# Altium PCB B302.PcbDoc
Units mm, origin at the board's own origin, x right, y up, seen from the top; angles counter-clockwise.
Board outline 30 x 59.25 mm, 4 copper layers (Top Layer, Int1, Int2, Bottom Layer), stack 0.922 mm thick; 98 components, 75 nets, 288 pads, 74 vias.
Unrouted connection lines stored in the file: 78.
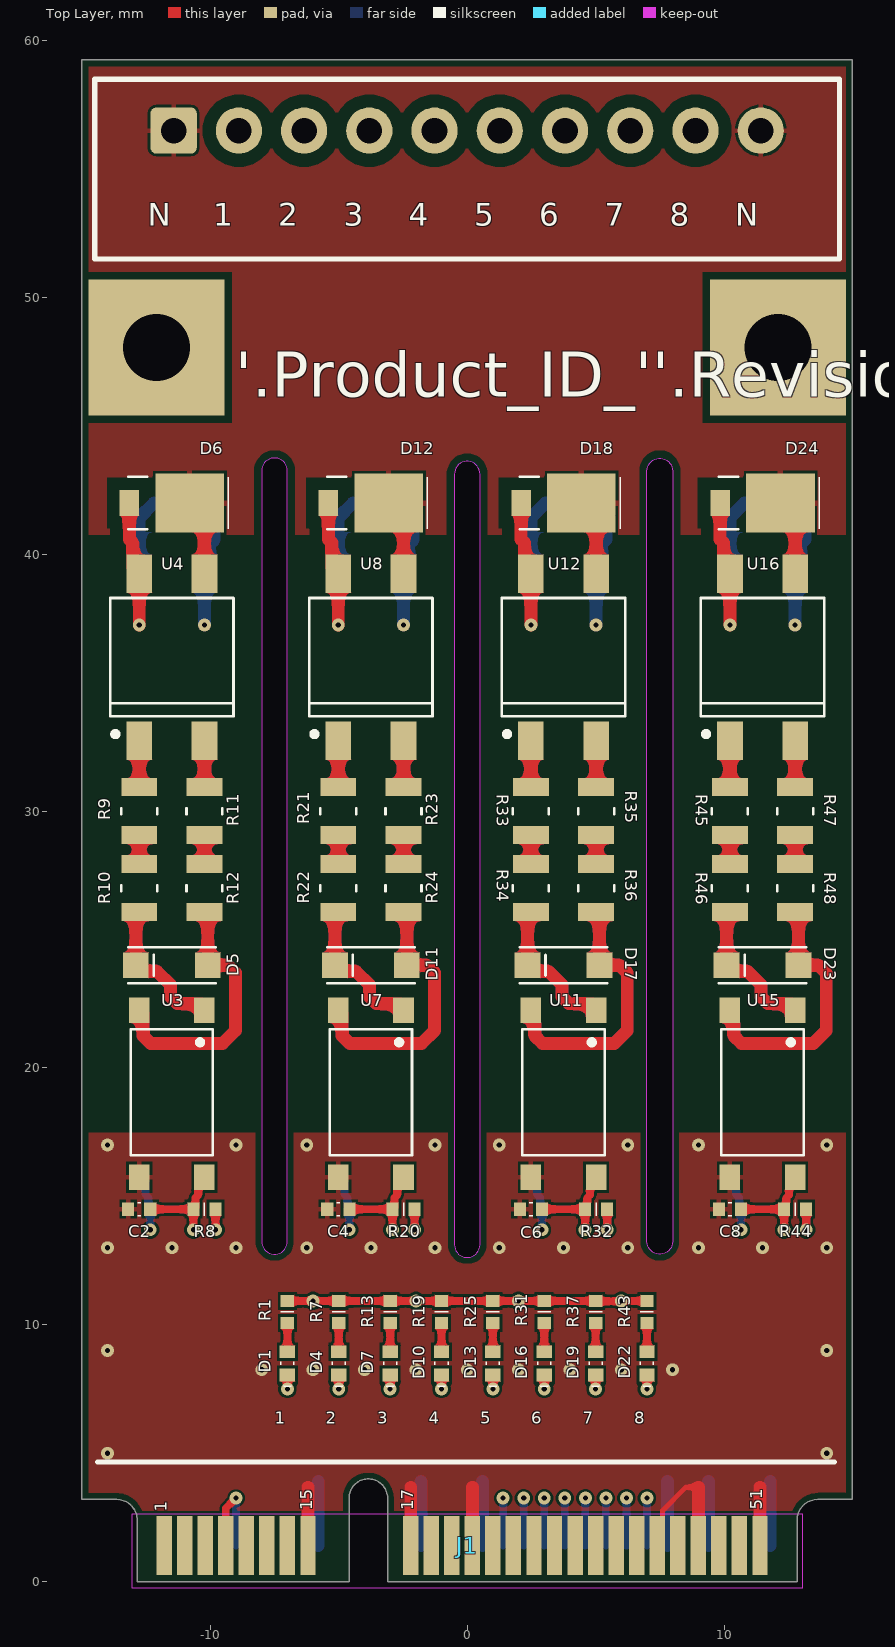
[diagram p0: Top Layer view]
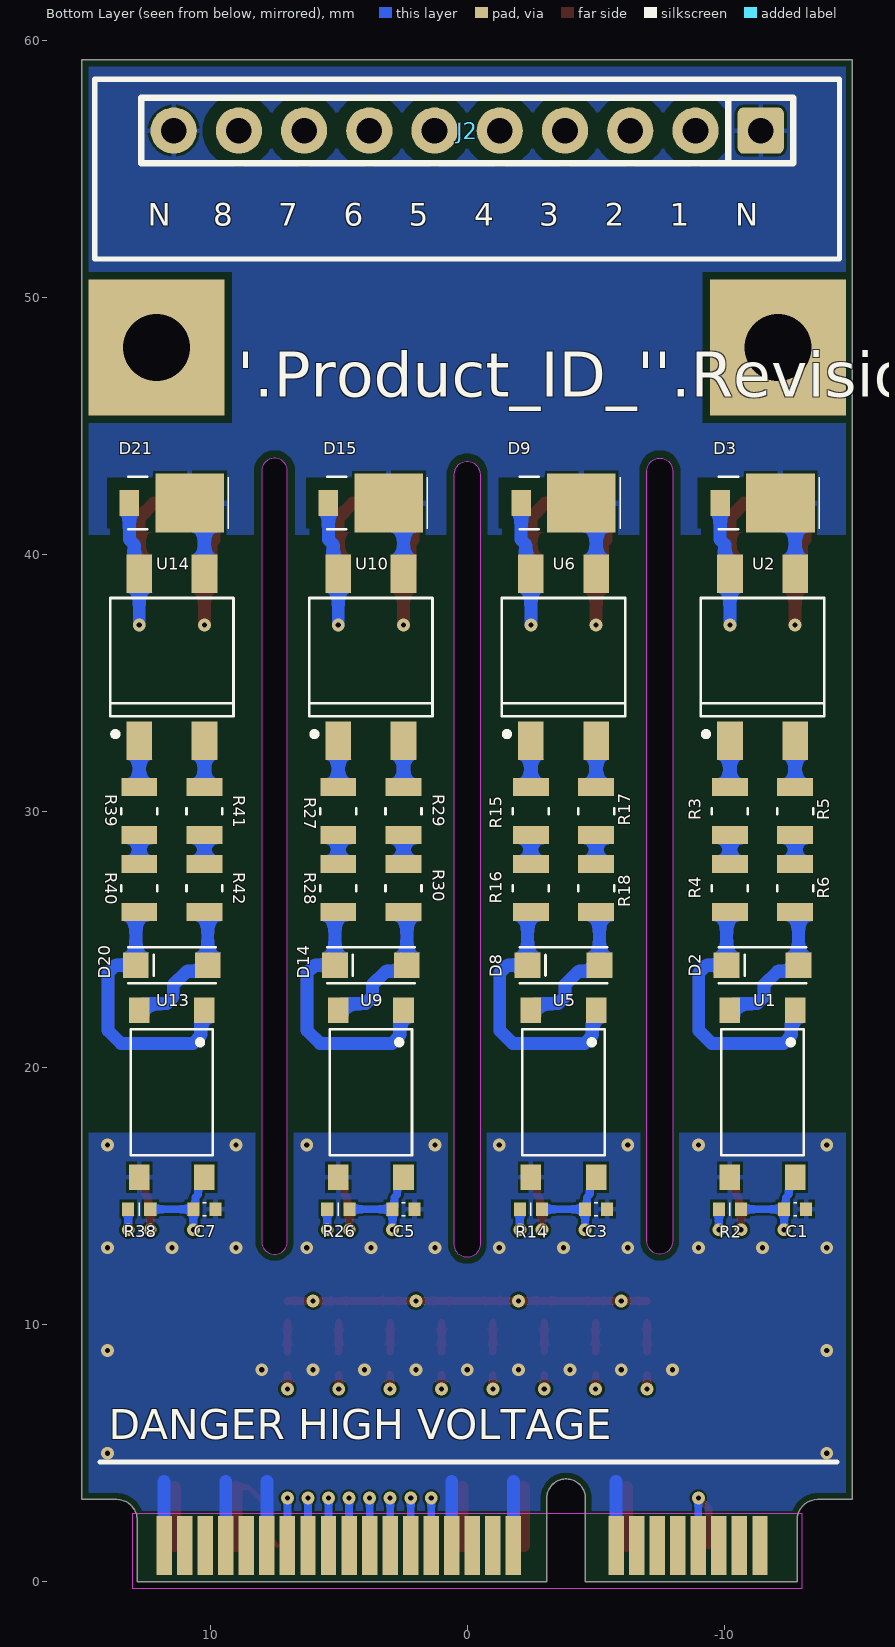
[diagram p1: Bottom Layer view, seen from below]
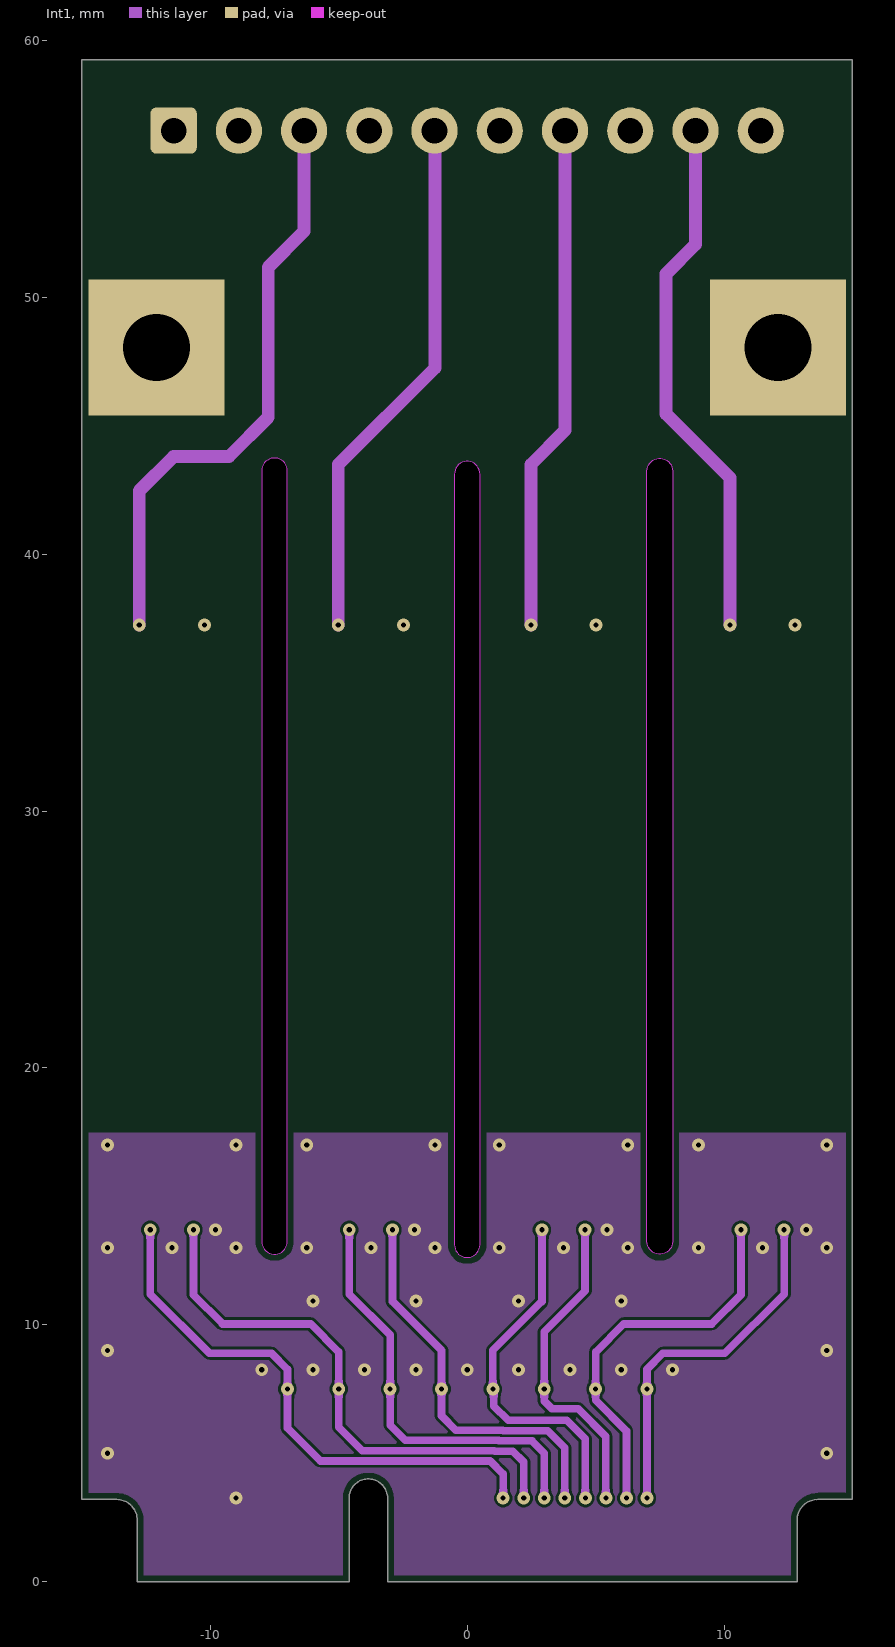
[diagram p2: Int1]
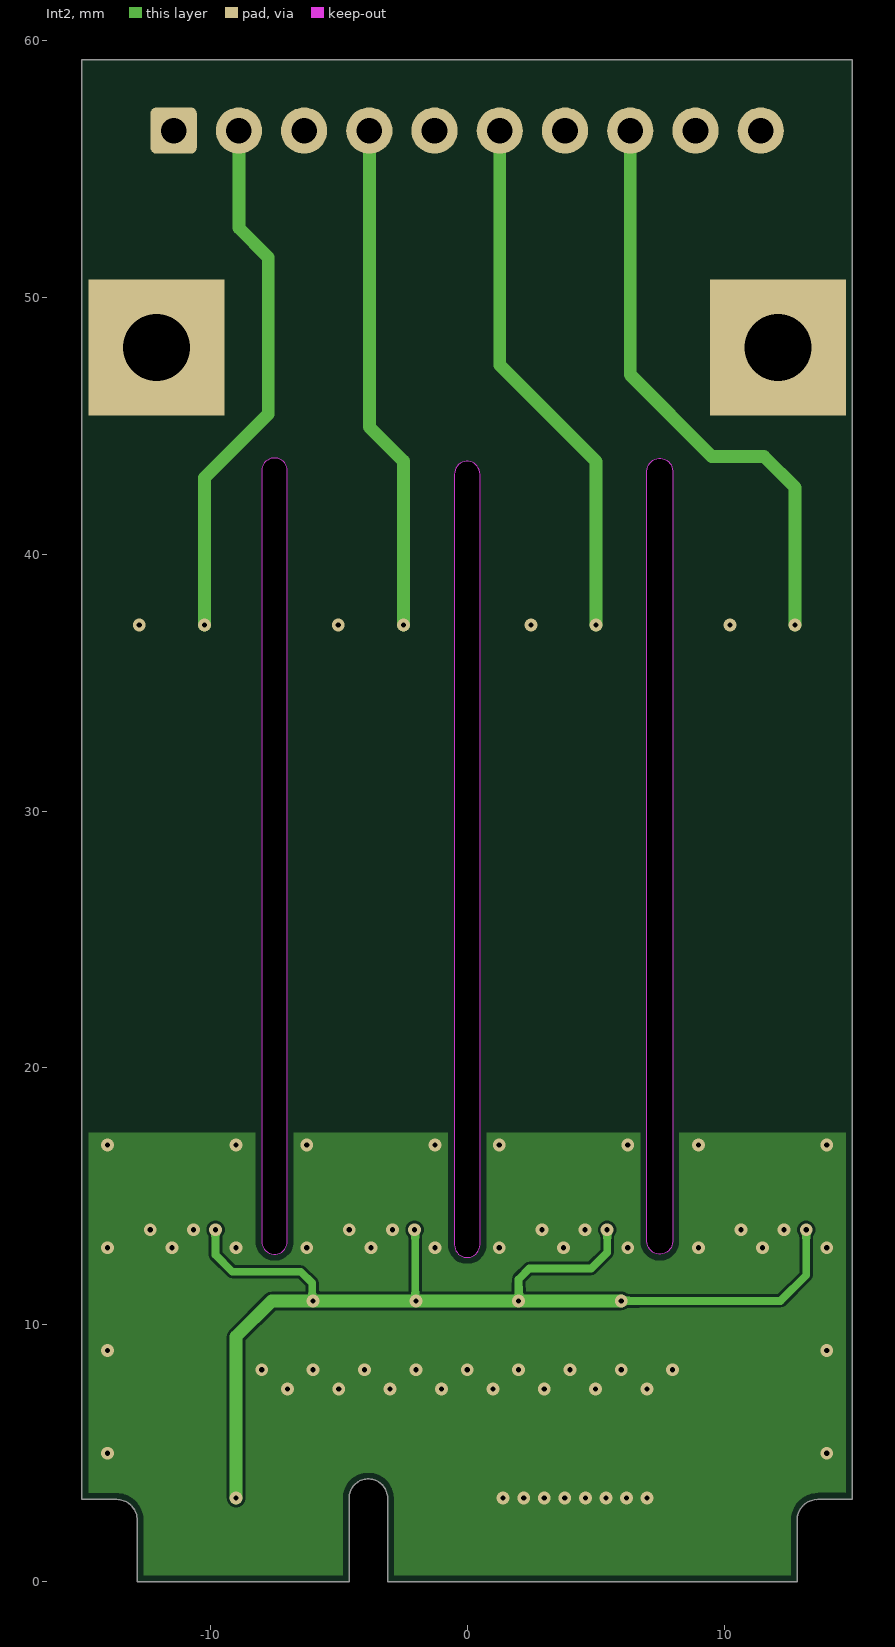
[diagram p3: Int2]
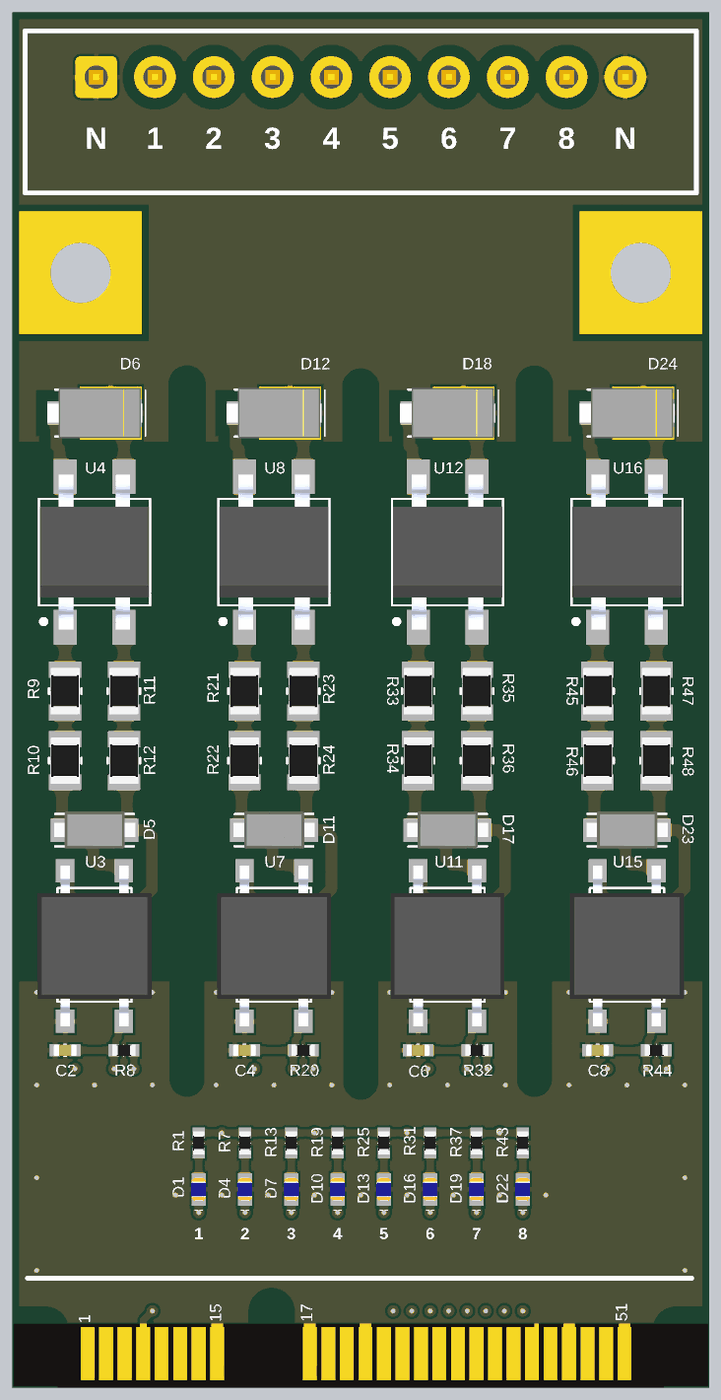
[diagram p4: 3D render of the assembled board from above, using the file's embedded part models]
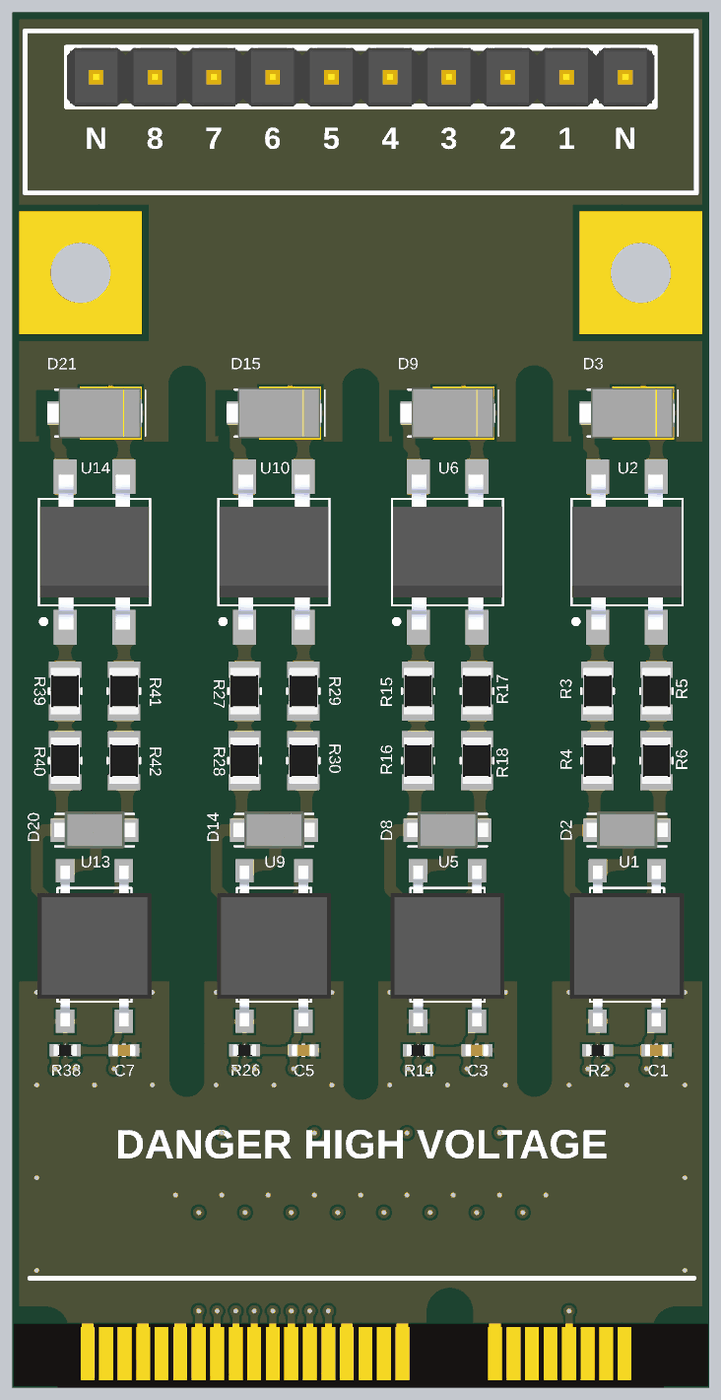
[diagram p5: 3D render of the assembled board from below, using the file's embedded part models]

## Layer stack, top to bottom
Top Solder: solder mask 0.0254, SM-001, Dk 4
Top Layer: signal copper 0.035
Dielectric 1: prepreg 0.0864, PP-010, Dk 4
Int1: signal copper 0.035
Dielectric 3: core 0.6096, Core-038, Dk 4.6
Int2: signal copper 0.035
Dielectric 5: prepreg 0.0864, PP-010, Dk 4
Bottom Layer: signal copper 0.035
Bottom Solder: solder mask 0.0254, SM-001, Dk 4

## Board outline
-12.85,0 -12.85,2.4 ccw(c-13.65,2.4) -13.65,3.2 -15,3.2 -15,59.25 15,59.25 15,3.2 13.65,3.2 ccw(c13.65,2.4) 12.85,2.4 12.85,0 -3.1,0 -3.1,3.25 ccw(c-3.85,3.25) -4.6,3.25 -4.6,0
cut-out: 7,13.245 7,43.245 cw(c7.5,43.245) 8,43.245 8,13.245 cw(c7.5,13.245)
cut-out: -0.5,13.123 ccw(c0,13.123) 0.5,13.123 0.5,43.123 ccw(c0,43.123) -0.5,43.123
cut-out: -8,13.25 ccw(c-7.5,13.25) -7,13.25 -7,43.25 ccw(c-7.5,43.25) -8,43.25

## Design rules (kind name [scope] priority, off if disabled: settings)
BoardOutlineClearance [All] p1: gap=0.25 ignorepadtopadclearanceinfootprint=FALSE except(0: Arc-SplitContinuation Track-SplitContinuation SMDPad-SplitContinuation THPad-SplitContinuation Via-SplitContinuation Fill-SplitContinuation Poly-SplitContinuation Region-SplitContinuation Text-SplitContinuation)
Clearance [InNet('INPUT_1')] p1: gap=0.5 ignorepadtopadclearanceinfootprint=TRUE
Clearance Clearance_1 [InNet('INPUT_2')] p2: gap=0.5 ignorepadtopadclearanceinfootprint=TRUE
Clearance Clearance_2 [InNet('INPUT_3')] p3: gap=0.5 ignorepadtopadclearanceinfootprint=TRUE
Clearance Clearance_3 [InNet('INPUT_4')] p4: gap=0.5 ignorepadtopadclearanceinfootprint=TRUE
Clearance Clearance_4 [InNet('INPUT_5')] p5: gap=0.5 ignorepadtopadclearanceinfootprint=TRUE
Clearance Clearance_5 [InNet('INPUT_6')] p6: gap=0.5 ignorepadtopadclearanceinfootprint=TRUE
Clearance Clearance_6 [InNet('INPUT_7')] p7: gap=0.5 ignorepadtopadclearanceinfootprint=TRUE
Clearance Clearance_7 [InNet('INPUT_8')] p8: gap=0.5 ignorepadtopadclearanceinfootprint=TRUE
Clearance Clearance_8 [InNet('NOTR')] p9: gap=0.3 ignorepadtopadclearanceinfootprint=TRUE
Clearance Clearance-xPP-xTP-xTT [All] p10: gap=0.1 ignorepadtopadclearanceinfootprint=FALSE except(0: Arc-Hole Track-Hole SMDPad-Hole THPad-Hole Via-Hole Fill-Hole Poly-Hole Region-Hole Text-Hole)
ComponentClearance [All] p1: gap=0.25 collisioncheckmode=3 verticalgap=0.25 showdistances=FALSE
DiffPairsRouting [All] p1: maxlimit=0.25 minlimit=0.25 mostfreqgap=0.25 toplayer_minwidth=0.381 toplayer_maxwidth=0.381 toplayer_prefwidth=0.381 midlayer1_minwidth=0.381 midlayer1_maxwidth=0.381 midlayer1_prefwidth=0.381 midlayer2_minwidth=0.381 midlayer2_maxwidth=0.381 midlayer2_prefwidth=0.381 bottomlayer_minwidth=0.381 bottomlayer_maxwidth=0.381 bottomlayer_prefwidth=0.381 maxuncoupledlength=12.5
Height [All] p1: minheight=0 maxheight=25 prefheight=12.5
HoleSize HoleSize-PTH [All] p1: absolutevalues=TRUE maxlimit=5 minlimit=0.15 maxpercent=80.000 minpercent=20.000
HoleToHoleClearance [All] p1: gap=0.35 allowstackedmicrovias=TRUE
MinimumAnnularRing "Minimum IAR  <= 0.45mm" [((ObjectKind = 'Pad') OR (ObjectKind = 'Via')) And (Layer = 'MultiLayer') And (HoleDiameter <= AsMM(0.45))] p1: minimumring=0.125 // minimum inner annular ring for pads <= 0.45mm finished hole size
MinimumAnnularRing "Minimum IAR  > 0.45mm" [((ObjectKind = 'Pad') OR (ObjectKind = 'Via')) And (Layer = 'MultiLayer') And (HoleDiameter > AsMM(0.45))] p2: minimumring=0.125 // minimum inner annular ring for pads > 0.45mm finished hole size
MinimumAnnularRing Minimum-IAR [All] p3: minimumring=0.125
MinimumSolderMaskSliver [All] p1: minsoldermaskwidth=0.08
PlaneClearance [InNet('ANT_GSM')] p1: clearance=0.05
PlaneClearance PlaneClearance-IPI [All] p2: clearance=0.25
PlaneConnect [All] p1: planeconnectstyle=Relief reliefexpansion=0.175 reliefentries=4 reliefconductorwidth=0.2 reliefairgap=0.1
PolygonConnect PolygonConnect_Via [All vs (ObjectKind = 'Via') And (HoleDiameter <= AsMM(0.45))] p1: connectstyle=Direct reliefconductorwidth=0.254 reliefentries=4 polygonreliefangle="90 Angle" airgapwidth=0.254
PolygonConnect PolygonConnect-xTW [All] p2: connectstyle=Relief reliefconductorwidth=0.2 reliefentries=4 polygonreliefangle="90 Angle" airgapwidth=0.1
RoutingCorners [All] p1: cornerstyle=45-Degree minsetback=2.5 maxsetback=2.5
RoutingVias "RoutingVias <= 0.45mm" [(ObjectKind = 'Via') And (HoleDiameter <= AsMM(0.45))] p1: holewidth=0.2 width=0.55 viastyle="Through Hole" minholewidth=0.15 minwidth=0.5 maxholewidth=0.45 maxwidth=0.8
RoutingVias "RoutingVias > 0.45mm" [(ObjectKind = 'Via') And (HoleDiameter > AsMM(0.45))] p2: holewidth=0.5 width=0.85 viastyle="Through Hole" minholewidth=0.5 minwidth=0.85 maxholewidth=0.9 maxwidth=1.25
SilkToSilkClearance [All] p1: silktosilkclearance=0.2
SilkToSolderMaskClearance SilkscreenOverComponentPads [IsPad] p1: minsilkscreentomaskgap=0.1 clearancetoexposedcopper=TRUE
SolderMaskExpansion SolderMaskExpansion_Via [(ObjectKind = 'Via') And (HoleDiameter <= AsMM(0.45))] p1: expansion=0.01 istentingtop=TRUE soldermaskfromhole=TRUE
SolderMaskExpansion [All] p2: expansion=0.01 istentingtop=FALSE
SupplyNets "Schematic Supply Nets_2" [InNet('3V3')] p1: voltage=3.300
SupplyNets "Schematic Supply Nets_1" [InNet('GND')] p2: voltage=0.000
SupplyNets "Schematic Supply Nets" [InNet('NOTR')] p3: voltage=0.000
UnRoutedNet [All] p1: checkbadconnections=TRUE
Width Width-xTW [All] p1: maxlimit=1.5 minlimit=0.1 preferedwidth=0.2
18 further rules are at their usual default settings.

## Classes and differential pairs
component class "Sense 8 Signal Isolator": C8 D22 D23 D24 R43 R44 R45 R46 R47 R48 U15 U16
component class "Sense 6 Signal Isolator": C6 D16 D17 D18 R31 R32 R33 R34 R35 R36 U11 U12
component class "Sense 5 Signal Isolator": C5 D13 D14 D15 R25 R26 R27 R28 R29 R30 U9 U10
component class "Sense 3 Signal Isolator": C3 D7 D8 D9 R13 R14 R15 R16 R17 R18 U5 U6
component class "HV Input Connector": J2
component class "Sense 4 Signal Isolator": C4 D10 D11 D12 R19 R20 R21 R22 R23 R24 U7 U8
component class "Sense 1 Signal Isolator": C1 D1 D2 D3 R1 R2 R3 R4 R5 R6 U1 U2
component class "Sense 7 Signal Isolator": C7 D19 D20 D21 R37 R38 R39 R40 R41 R42 U13 U14
component class "Sense 2 Signal Isolator": C2 D4 D5 D6 R7 R8 R9 R10 R11 R12 U3 U4
component class "Card Edge Connector": J1

## Components (designator, comment, footprint, x,y, rotation, side; value= is the part's Value field where it differs from the comment)
C1 "Capacitor - 100nF [0402] (MLCC)" CAPACITOR_0402 -12.77,14.5 r0 bottom value=100nF
C2 "Capacitor - 100nF [0402] (MLCC)" CAPACITOR_0402 -12.77,14.5 r0 top value=100nF
C3 "Capacitor - 100nF [0402] (MLCC)" CAPACITOR_0402 -5.02,14.5 r0 bottom value=100nF
C4 "Capacitor - 100nF [0402] (MLCC)" CAPACITOR_0402 -5.02,14.5 r0 top value=100nF
C5 "Capacitor - 100nF [0402] (MLCC)" CAPACITOR_0402 2.48,14.5 r0 bottom value=100nF
C6 "Capacitor - 100nF [0402] (MLCC)" CAPACITOR_0402 2.48,14.5 r0 top value=100nF
C7 "Capacitor - 100nF [0402] (MLCC)" CAPACITOR_0402 10.23,14.5 r0 bottom value=100nF
C8 "Capacitor - 100nF [0402] (MLCC)" CAPACITOR_0402 10.23,14.5 r0 top value=100nF
D1 "SMD LED (Red)" LED_0402 -7,8.5 r90 top
D2 "BZT52H-B5V1,115" SOD-123F-2 -11.5,24 r180 bottom
D3 "SMAJ440A" DO-220AA-2 -11.5,42 r0 bottom
D4 "SMD LED (Red)" LED_0402 -5,8.5 r90 top
D5 "BZT52H-B5V1,115" SOD-123F-2 -11.5,24 r0 top
D6 "SMAJ440A" DO-220AA-2 -11.5,42 r180 top
D7 "SMD LED (Red)" LED_0402 -3,8.5 r90 top
D8 "BZT52H-B5V1,115" SOD-123F-2 -3.75,24 r180 bottom
D9 "SMAJ440A" DO-220AA-2 -3.75,42 r0 bottom
D10 "SMD LED (Red)" LED_0402 -1,8.5 r90 top
D11 "BZT52H-B5V1,115" SOD-123F-2 -3.75,24 r0 top
D12 "SMAJ440A" DO-220AA-2 -3.75,42 r180 top
D13 "SMD LED (Red)" LED_0402 1,8.5 r90 top
D14 "BZT52H-B5V1,115" SOD-123F-2 3.75,24 r180 bottom
D15 "SMAJ440A" DO-220AA-2 3.75,42 r0 bottom
D16 "SMD LED (Red)" LED_0402 3,8.5 r90 top
D17 "BZT52H-B5V1,115" SOD-123F-2 3.75,24 r0 top
D18 "SMAJ440A" DO-220AA-2 3.75,42 r180 top
D19 "SMD LED (Red)" LED_0402 5,8.5 r90 top
D20 "BZT52H-B5V1,115" SOD-123F-2 11.5,24 r180 bottom
D21 "SMAJ440A" DO-220AA-2 11.5,42 r0 bottom
D22 "SMD LED (Red)" LED_0402 7,8.5 r90 top
D23 "BZT52H-B5V1,115" SOD-123F-2 11.5,24 r0 top
D24 "SMAJ440A" DO-220AA-2 11.5,42 r180 top
J1 "Connector - Mini PCI-E (Male B302-PCIe)" "PCB - Mini PCI Express" -3.85,3.25 r0 top
J2 "2.54 mm Pitch 8P Male Connector" "Pin Header 1x10 TH Pitch 2.54mm" -11.43,56.5 r0 bottom
R1 "4K7 - 0402 - %1 - 1/16W" RESISTOR_0402 -7,10.5 r90 top value=4K7
R2 "47K - 0402 - %1 - 1/16W" RESISTOR_0402 -10.23,14.5 r0 bottom value=47K
R3 "180K - 0805 - %0.5 - 1/2W" RESISTOR_0805 -10.23,30 r90 bottom value=180K
R4 "180K - 0805 - %0.5 - 1/2W" RESISTOR_0805 -10.23,27 r90 bottom value=180K
R5 "180K - 0805 - %0.5 - 1/2W" RESISTOR_0805 -12.77,30 r90 bottom value=180K
R6 "180K - 0805 - %0.5 - 1/2W" RESISTOR_0805 -12.77,27 r90 bottom value=180K
R7 "4K7 - 0402 - %1 - 1/16W" RESISTOR_0402 -5,10.5 r90 top value=4K7
R8 "47K - 0402 - %1 - 1/16W" RESISTOR_0402 -10.23,14.5 r0 top value=47K
R9 "180K - 0805 - %0.5 - 1/2W" RESISTOR_0805 -12.77,30 r90 top value=180K
R10 "180K - 0805 - %0.5 - 1/2W" RESISTOR_0805 -12.77,27 r90 top value=180K
R11 "180K - 0805 - %0.5 - 1/2W" RESISTOR_0805 -10.23,30 r90 top value=180K
R12 "180K - 0805 - %0.5 - 1/2W" RESISTOR_0805 -10.23,27 r90 top value=180K
R13 "4K7 - 0402 - %1 - 1/16W" RESISTOR_0402 -3,10.5 r90 top value=4K7
R14 "47K - 0402 - %1 - 1/16W" RESISTOR_0402 -2.48,14.5 r0 bottom value=47K
R15 "180K - 0805 - %0.5 - 1/2W" RESISTOR_0805 -2.48,30 r90 bottom value=180K
R16 "180K - 0805 - %0.5 - 1/2W" RESISTOR_0805 -2.48,27 r90 bottom value=180K
R17 "180K - 0805 - %0.5 - 1/2W" RESISTOR_0805 -5.02,30 r90 bottom value=180K
R18 "180K - 0805 - %0.5 - 1/2W" RESISTOR_0805 -5.02,27 r90 bottom value=180K
R19 "4K7 - 0402 - %1 - 1/16W" RESISTOR_0402 -1,10.5 r90 top value=4K7
R20 "47K - 0402 - %1 - 1/16W" RESISTOR_0402 -2.48,14.5 r0 top value=47K
R21 "180K - 0805 - %0.5 - 1/2W" RESISTOR_0805 -5.02,30 r90 top value=180K
R22 "180K - 0805 - %0.5 - 1/2W" RESISTOR_0805 -5.02,27 r90 top value=180K
R23 "180K - 0805 - %0.5 - 1/2W" RESISTOR_0805 -2.48,30 r90 top value=180K
R24 "180K - 0805 - %0.5 - 1/2W" RESISTOR_0805 -2.48,27 r90 top value=180K
R25 "4K7 - 0402 - %1 - 1/16W" RESISTOR_0402 1,10.5 r90 top value=4K7
R26 "47K - 0402 - %1 - 1/16W" RESISTOR_0402 5.02,14.5 r0 bottom value=47K
R27 "180K - 0805 - %0.5 - 1/2W" RESISTOR_0805 5.02,30 r90 bottom value=180K
R28 "180K - 0805 - %0.5 - 1/2W" RESISTOR_0805 5.02,27 r90 bottom value=180K
R29 "180K - 0805 - %0.5 - 1/2W" RESISTOR_0805 2.48,30 r90 bottom value=180K
R30 "180K - 0805 - %0.5 - 1/2W" RESISTOR_0805 2.48,27 r90 bottom value=180K
R31 "4K7 - 0402 - %1 - 1/16W" RESISTOR_0402 3,10.5 r90 top value=4K7
R32 "47K - 0402 - %1 - 1/16W" RESISTOR_0402 5.02,14.5 r0 top value=47K
R33 "180K - 0805 - %0.5 - 1/2W" RESISTOR_0805 2.48,30 r90 top value=180K
R34 "180K - 0805 - %0.5 - 1/2W" RESISTOR_0805 2.48,27 r90 top value=180K
R35 "180K - 0805 - %0.5 - 1/2W" RESISTOR_0805 5.02,30 r90 top value=180K
R36 "180K - 0805 - %0.5 - 1/2W" RESISTOR_0805 5.02,27 r90 top value=180K
R37 "4K7 - 0402 - %1 - 1/16W" RESISTOR_0402 5,10.5 r90 top value=4K7
R38 "47K - 0402 - %1 - 1/16W" RESISTOR_0402 12.77,14.5 r0 bottom value=47K
R39 "180K - 0805 - %0.5 - 1/2W" RESISTOR_0805 12.77,30 r90 bottom value=180K
R40 "180K - 0805 - %0.5 - 1/2W" RESISTOR_0805 12.77,27 r90 bottom value=180K
R41 "180K - 0805 - %0.5 - 1/2W" RESISTOR_0805 10.23,30 r90 bottom value=180K
R42 "180K - 0805 - %0.5 - 1/2W" RESISTOR_0805 10.23,27 r90 bottom value=180K
R43 "4K7 - 0402 - %1 - 1/16W" RESISTOR_0402 7,10.5 r90 top value=4K7
R44 "47K - 0402 - %1 - 1/16W" RESISTOR_0402 12.77,14.5 r0 top value=47K
R45 "180K - 0805 - %0.5 - 1/2W" RESISTOR_0805 10.23,30 r90 top value=180K
R46 "180K - 0805 - %0.5 - 1/2W" RESISTOR_0805 10.23,27 r90 top value=180K
R47 "180K - 0805 - %0.5 - 1/2W" RESISTOR_0805 12.77,30 r90 top value=180K
R48 "180K - 0805 - %0.5 - 1/2W" RESISTOR_0805 12.77,27 r90 top value=180K
U1 "VOM617A-4T" SOP-4V2 -11.5,19 r270 bottom
U2 "LTV-846S" SOIC-4 -11.5,36 r270 bottom
U3 "VOM617A-4T" SOP-4V2 -11.5,19 r270 top
U4 "LTV-846S" SOIC-4 -11.5,36 r270 top
U5 "VOM617A-4T" SOP-4V2 -3.75,19 r270 bottom
U6 "LTV-846S" SOIC-4 -3.75,36 r270 bottom
U7 "VOM617A-4T" SOP-4V2 -3.75,19 r270 top
U8 "LTV-846S" SOIC-4 -3.75,36 r270 top
U9 "VOM617A-4T" SOP-4V2 3.75,19 r270 bottom
U10 "LTV-846S" SOIC-4 3.75,36 r270 bottom
U11 "VOM617A-4T" SOP-4V2 3.75,19 r270 top
U12 "LTV-846S" SOIC-4 3.75,36 r270 top
U13 "VOM617A-4T" SOP-4V2 11.5,19 r270 bottom
U14 "LTV-846S" SOIC-4 11.5,36 r270 bottom
U15 "VOM617A-4T" SOP-4V2 11.5,19 r270 top
U16 "LTV-846S" SOIC-4 11.5,36 r270 top

## Footprints (in the part's own frame and the unit in brackets; to place one, negate y for a bottom-side part, rotate by r counter-clockwise, add the part's x,y. Pads: shape width x height; smd on the part's side, far side on the other; paste and mask are expansions set on the pad)
CAPACITOR_0402 [mm] "Chip Capacitor, IPC High Density"
  rect 0.47x0.52 smd mask+0.01: 1(-0.43,0) 2(0.43,0)
  silkscreen extent -0.06,-0.25 0.06,0.25, body extent -0.5,-0.25 0.5,0.25, height 0.49
DO-220AA-2 [mm]
  rect 0.762x1 smd mask+0.01: 1(1.653,0)
  rect 2.67x2.3 smd paste-2 mask+0.01: 2(-0.699,0)
  silkscreen extent -2.2,-1.01 1.7,1.01, body extent -2.05,-1.08 2.05,1.08, height 0.99
LED_0402 [mm] "LED, IPC High Density"
  rect 0.5x0.6 smd mask+0.01: 1(-0.45,0) 2(0.45,0)
  silkscreen extent -0.9,-0.25 0.06,0.25, body extent -0.5,-0.3 0.5,0.3, height 0.18
"PCB - Mini PCI Express" [mm]
  rect 0.6x2.3 smd paste-0.9: 1(-7.95,-1.85) 3(-7.15,-1.85) 5(-6.35,-1.85) 7(-5.55,-1.85) 9(-4.75,-1.85) 11(-3.95,-1.85) 13(-3.15,-1.85) 15(-2.35,-1.85) 17(1.65,-1.85) 19(2.45,-1.85) 21(3.25,-1.85) 23(4.05,-1.85) 25(4.85,-1.85) 27(5.65,-1.85) 29(6.45,-1.85) 31(7.25,-1.85) 33(8.05,-1.85) 35(8.85,-1.85) 37(9.65,-1.85) 39(10.45,-1.85) 41(11.25,-1.85) 43(12.05,-1.85) 45(12.85,-1.85) 47(13.65,-1.85) 49(14.45,-1.85) 51(15.25,-1.85)
  rect 0.6x2.3 smd far side paste-0.9: 2(-7.55,-1.85) 4(-6.75,-1.85) 6(-5.95,-1.85) 8(-5.15,-1.85) 10(-4.35,-1.85) 12(-3.55,-1.85) 14(-2.75,-1.85) 16(-1.95,-1.85) 18(2.05,-1.85) 20(2.85,-1.85) 22(3.65,-1.85) 24(4.45,-1.85) 26(5.25,-1.85) 28(6.05,-1.85) 30(6.85,-1.85) 32(7.65,-1.85) 34(8.45,-1.85) 36(9.25,-1.85) 38(10.05,-1.85) 40(10.85,-1.85) 42(11.65,-1.85) 44(12.45,-1.85) 46(13.25,-1.85) 48(14.05,-1.85) 50(14.85,-1.85) 52(15.65,-1.85)
  Top Layer keep-out region: -9.2,-0.6 16.9,-0.6 16.9,-3.5 -9.2,-3.5
  Bottom Layer keep-out region: -9.2,-0.6 16.9,-0.6 16.9,-3.5 -9.2,-3.5
"Pin Header 1x10 TH Pitch 2.54mm" [mm] "PinHeader 1x10 TH Pitch 2.54mm"
  rrect25% 1.8x1.8 hole 1: 1(0,0)
  round 1.8 hole 1: 2(2.54,0) 3(5.08,0) 4(7.62,0) 5(10.16,0) 6(12.7,0) 7(15.24,0) 8(17.78,0) 9(20.32,0) 10(22.86,0)
  silkscreen extent -1.27,-1.27 24.13,1.27, body extent -1.27,-1.27 24.13,1.27, height 9.5
RESISTOR_0402 [mm] "Chip Resistor, IPC High Density"
  rect 0.47x0.52 smd mask+0.01: 1(-0.43,0) 2(0.43,0)
  silkscreen extent 0,-0.25 0,0.25, body extent -0.5,-0.25 0.5,0.25, height 0.35
RESISTOR_0805 [mm] "Chip Resistor, IPC High Density"
  rect 0.7x1.4 smd mask+0.01: 1(-0.935,0) 2(0.935,0)
  silkscreen extent -0.12,-0.7 0.12,0.7, body extent -1,-0.63 1,0.63, height 0.45
SOD-123F-2 [mm]
  rect 1x1 smd mask+0.01: 1(-1.4,0) 2(1.4,0)
  silkscreen extent -1.7,-0.7 1.7,0.7, body extent -1.74,-0.79 1.76,0.81, height 1.1
SOIC-4 [mm]
  rect 1.5x1 smd mask+0.01: 1(3.25,-1.27) 2(3.25,1.27) 3(-3.25,1.27) 4(-3.25,-1.27)
  silkscreen extent -2.3,-2.4 3.1,2.4, body extent -3.35,-2.36 3.35,2.36, height 2.9
SOP-4V2 [mm]
  rect 1x0.8 smd mask+0.01: 1(-3.25,1.27) 2(-3.25,-1.27) 3(3.25,-1.27) 4(3.25,1.27)
  silkscreen extent -2.5,-1.6 2.4,1.6, body extent -3.47,-2.46 3.47,2.46, height 2.16

## Part data
C1 C2 C3 C4 C5 C6 C7 C8: library part "Capacitor - 100nF [0402-6V3]", "Capacitor (MLCC) - 100nF / 6V3 / 0402", Case=0402, Manufacturer Name="KYOCERA AVX", Manufacturer Part Number=04026D104KAT4A, Tolerance=%10, Voltage=6V3, ComponentLink1Description=Mouser, ComponentLink1URL=https://www.mouser.com.tr/ProductDetail/AVX/04026D104KAT4A?qs=sGAEpiMZZMs0AnBnWHyRQPg4iYkCw7IMED%2F4kpqgf7w%3D, ComponentLink2Description=DataSheet, ComponentLink2URL=https://www.mouser.com.tr/datasheet/2/40/cx5r-776519.pdf, Subcategory=Capacitors
D1 D4 D7 D10 D13 D16 D19 D22: library part "Diode - LED (0402-Red)", "Standard LEDs - SMD MINI-MOLD ULTRA COMPACT RED", Case=0402, Color=Red, Manufacturer Name="ROHM Semiconductor", Manufacturer Part Number=SML-P12VTT86R, ComponentLink1Description=DataSheet, ComponentLink1URL=https://www.mouser.com.tr/datasheet/2/348/sml-p1-e-1139198.pdf, ComponentLink2Description=Mouser, ComponentLink2URL=https://www.mouser.com.tr/ProductDetail/ROHM-Semiconductor/SML-P12U2TT86R?qs=sGAEpiMZZMseGfSY3csMkRIBDsfU3UCXJTULB5gem9Ta%252Bp%252BvZ709fg%3D%3D, ROHS=Yes
D2 D5 D8 D11 D14 D17 D20 D23: library part "Diode - BZT52H-B5V1,115", "Zener Diodes BZT52H-B5V1/SOD123F/SOD2", Case=SOD-123F-2, Manufacturer Name=Nexperia, Zener Voltage=5V1, Manufacturer Part Number=BZT52H-B5V1,115, Product Type="Zener Diodes", ROHS=Yes
D3 D6 D9 D12 D15 D18 D21 D24: library part "Diode - SMAJ440A (TVS)", "ESD Protection Diodes / TVS Diodes 440volts 1uA .6 Amps Uni-Dir", BreakDown Voltage="492 V", Case=DO-214AC-2, Clamping Voltage="713 V", Manufacturer Name=Bourns, Peak Pulse Current="600 mA", Working Voltage="440 V", Manufacturer Part Number=SMAJ440A, Product Type="TVS Diodes", ROHS=Yes
J1: "Mini PCI-Express gold finger connector.", BUS Type="Mini PCI Express", Mating Connector="TE 2041262-1", Number of Positions=52, Pitch="0.8 mm", System=Connector
J2: library part "Connector - Male Header 10P (2.54)", "Headers & Wire Housings BREAKAWAY HDR VERT 8", Manufacturer Name=Molex, Manufacturer Part Number=22-28-4103, Pitch="2.54 mm", Position=10, ROHS=Yes, Row=1
R1 R7 R13 R19 R25 R31 R37 R43: library part "Resistor - 4K7 [0402]", "Thick Film Resistors - SMD 1/16 W 4.7 KOhm 1%", Case=0402, Manufacturer Name=Vishay, Manufacturer Part Number=CRCW04024K70FKED, Power=1/16W, Tolerance=%1, ComponentLink1Description=DataSheet, ComponentLink1URL=https://www.mouser.com.tr/datasheet/2/427/dcrcwe3-1762152.pdf, ComponentLink2Description=Mouser, ComponentLink2URL=https://www.mouser.com.tr/ProductDetail/Vishay-Dale/CRCW04024K70FKED?qs=sGAEpiMZZMu61qfTUdNhG7nHf%2F6MTUn3HadIdDQu24Q%3D
R2 R8 R14 R20 R26 R32 R38 R44: library part "Resistor - 47K [0402]", "Thick Film Resistors - SMD 1/16 W 47 KOhm 1%", Case=0402, Manufacturer Name=Vishay, Manufacturer Part Number=CRCW040247K0FKED, Power=1/16W, Tolerance=%1, ComponentLink1Description=DataSheet, ComponentLink1URL=https://www.mouser.com.tr/datasheet/2/427/dcrcwe3-1762152.pdf, ComponentLink2Description=Mouser, ComponentLink2URL=https://www.mouser.com.tr/ProductDetail/Vishay-Dale/CRCW040247K0FKED?qs=sGAEpiMZZMu61qfTUdNhG2DpbjADlD3GL%252B3h1elTxqU%3D
R3 R4 R5 R6 R9 R10 R11 R12 R15 R16 R17 R18 R21 R22 R23 R24 R27 R28 R29 R30 R33 R34 R35 R36 R39 R40 R41 R42 R45 R46 R47 R48: library part "Resistor - 180K [0805]", "Thick Film Resistors - SMD 0805 180Kohms 0.5W 0.5% AEC-Q200", Case=0805, Manufacturer Name=Panasonic, Manufacturer Part Number=ERJ-P06D1803V, Power=1/2W, Tolerance=%0.5, ComponentLink1Description=DataSheet, ComponentLink1URL=https://www.mouser.com.tr/datasheet/2/427/dcrcwe3-1762152.pdf, ComponentLink2Description=Mouser, ComponentLink2URL=https://www.mouser.com.tr/ProductDetail/Vishay-Dale/CRCW040210K0FKED?qs=sGAEpiMZZMu61qfTUdNhG2DpbjADlD3GcalbOv9utCY%3D
U1 U3 U5 U7 U9 U11 U13 U15: library part "IC - VOM617A", "Transistor Output Optocouplers Phototransistor Out CTR 160-320% 5mA", Case=SOP-4, Manufacturer Name=Vishay, Maximum Collector Current="100 mA", Vf - Forward Voltage=1V6, If - Forward Current="5 mA", Manufacturer Part Number=VOM617A-4T, Product Type="Transistor Output Optocouplers", ROHS=Yes
U2 U4 U6 U8 U10 U12 U14 U16: library part "IC - MB10S", "Transistor Output Optocouplers Optocplr Phototrans 4-Channel", Case=SOIC-4, Manufacturer Name=OnSemi, Manufacturer Part Number=MB10S, Vf - Forward Voltage="1 V", If - Forward Current="500 mA"

## Free pads (board coordinates)
  rect 5.3x5.3 hole 2.6: 1(-12.1,48.05) 2(12.1,48.05)

## Via types
v1: diameter 0.5, hole 0.2, Top Layer to Bottom Layer, tented both sides, 74 vias

## Nets (pads, with @x,y where several pads share a name; then routed paths per layer and width w, separated by ;. In a path a pad name is that pad's centre, name@x,y a point inside that pad or via, vN(x,y) a via of type N, cw(c..) or ccw(c..) an arc to the next point about the centre after c; other vN are vias at no path point)
3V3: J1.7 J1.8 R1.2 R2.2 R7.2 R8.2 R13.2 R14.2 R19.2 R20.2 R25.2 R26.2 R31.2 R32.2 R37.2 R38.2 R43.2 R44.2 | length 69.8
  Top Layer w0.3: v1(-9.8,13.7) R8.2 ; J1.7 -9.4,2.85 v1(-9,3.25) ; R1.2 v1(-6,10.93) R7.2 R13.2 v1(-2,10.93) R19.2 R25.2 v1(2,10.93) R31.2 R37.2 ; v1(-2.05,13.7) R20.2 ; R37.2@5.045,10.916 v1@6.045,10.916 ; v1(5.45,13.7) R32.2 ; v1(6,10.93) R43.2 ; v1(13.2,13.7) R44.2
  Int2 w0.3: v1(-9.8,13.7) -9.8,12.721 -9.144,12.065 -6.477,12.065 -6.038,11.626 -6.038,10.968 v1(-6,10.93) ; v1(-2.05,13.7) -2.025,13.675 -2.025,10.955 v1(-2,10.93) ; v1(2,10.93) 2,11.779 2.413,12.192 4.826,12.192 5.45,12.816 v1(5.45,13.7) ; v1(6,10.93) 12.2,10.93 13.2,11.93 v1(13.2,13.7)
  Int2 w0.5: v1(-9,3.25) -9,9.542 -7.612,10.93 v1(-6,10.93) v1(-2,10.93) v1(2,10.93) v1(6,10.93)
  Bottom Layer w0.3: v1(-9.8,13.7) R2.2 ; J1.8 v1(-9,3.25) ; v1(-2.05,13.7) R14.2 ; v1(5.45,13.7) R26.2 ; v1(13.2,13.7) R38.2
+SENSE_1_DC: D2.1 R4.1 U1.1 | length 10.6
  Bottom Layer w0.5: U1.1 -12.62,22.1 -12.62,21.256 -12.319,20.955 -9.525,20.955 -9.017,21.463 -9.017,23.71 -9.31,24.003 -10.097,24.003 D2.1 -10.1,25.965 -10.2,26.065 R4.1
+SENSE_2_DC: D5.1 R10.1 U3.1 | length 5.5
  Top Layer w0.5: D5.1 -12.9,25.965 -12.8,26.065 R10.1 ; D5.1@-12.672,23.762 -12.078,23.762 -11.557,23.241 -11.557,22.772 -11.285,22.5 -10.38,22.5 -10.23,22.35 U3.1
+SENSE_3_DC: D8.1 R16.1 U5.1 | length 10.6
  Bottom Layer w0.5: U5.1 -4.87,22.1 -4.87,21.256 -4.569,20.955 -1.775,20.955 -1.267,21.463 -1.267,23.71 -1.56,24.003 -2.347,24.003 D8.1 -2.35,25.965 -2.45,26.065 R16.1
+SENSE_4_DC: D11.1 R22.1 U7.1 | length 5.5
  Top Layer w0.5: D11.1 -5.15,25.965 -5.05,26.065 R22.1 ; D11.1@-4.922,23.762 -4.328,23.762 -3.807,23.241 -3.807,22.772 -3.535,22.5 -2.63,22.5 -2.48,22.35 U7.1
+SENSE_5_DC: D14.1 R28.1 U9.1 | length 10.6
  Bottom Layer w0.5: U9.1 2.63,22.1 2.63,21.256 2.931,20.955 5.725,20.955 6.233,21.463 6.233,23.71 5.94,24.003 5.153,24.003 D14.1 5.15,25.965 5.05,26.065 R28.1
+SENSE_6_DC: D17.1 R34.1 U11.1 | length 5.5
  Top Layer w0.5: D17.1 2.35,25.965 2.45,26.065 R34.1 ; D17.1@2.578,23.762 3.172,23.762 3.693,23.241 3.693,22.772 3.965,22.5 4.87,22.5 5.02,22.35 U11.1
+SENSE_7_DC: D20.1 R40.1 U13.1 | length 10.6
  Bottom Layer w0.5: U13.1 10.38,22.1 10.38,21.256 10.681,20.955 13.475,20.955 13.983,21.463 13.983,23.71 13.69,24.003 12.903,24.003 D20.1 12.9,25.965 12.8,26.065 R40.1
+SENSE_8_DC: D23.1 R46.1 U15.1 | length 5.5
  Top Layer w0.5: D23.1 10.1,25.965 10.2,26.065 R46.1 ; D23.1@10.328,23.762 10.922,23.762 11.443,23.241 11.443,22.772 11.715,22.5 12.62,22.5 12.77,22.35 U15.1
-SENSE_1_DC: D2.2 R6.1 U1.2 | length 5.5
  Bottom Layer w0.5: D2.2 -12.9,25.965 -12.8,26.065 R6.1 ; D2.2@-12.672,23.762 -12.078,23.762 -11.557,23.241 -11.557,22.772 -11.285,22.5 -10.38,22.5 -10.23,22.35 U1.2
-SENSE_2_DC: D5.2 R12.1 U3.2 | length 10.6
  Top Layer w0.5: U3.2 -12.62,22.1 -12.62,21.256 -12.319,20.955 -9.525,20.955 -9.017,21.463 -9.017,23.71 -9.31,24.003 -10.097,24.003 D5.2 -10.1,25.965 -10.2,26.065 R12.1
-SENSE_3_DC: D8.2 R18.1 U5.2 | length 5.5
  Bottom Layer w0.5: D8.2 -5.15,25.965 -5.05,26.065 R18.1 ; D8.2@-4.922,23.762 -4.328,23.762 -3.807,23.241 -3.807,22.772 -3.535,22.5 -2.63,22.5 -2.48,22.35 U5.2
-SENSE_4_DC: D11.2 R24.1 U7.2 | length 10.6
  Top Layer w0.5: U7.2 -4.87,22.1 -4.87,21.256 -4.569,20.955 -1.775,20.955 -1.267,21.463 -1.267,23.71 -1.56,24.003 -2.347,24.003 D11.2 -2.35,25.965 -2.45,26.065 R24.1
-SENSE_5_DC: D14.2 R30.1 U9.2 | length 5.5
  Bottom Layer w0.5: D14.2 2.35,25.965 2.45,26.065 R30.1 ; D14.2@2.578,23.762 3.172,23.762 3.693,23.241 3.693,22.772 3.965,22.5 4.87,22.5 5.02,22.35 U9.2
-SENSE_6_DC: D17.2 R36.1 U11.2 | length 10.6
  Top Layer w0.5: U11.2 2.63,22.1 2.63,21.256 2.931,20.955 5.725,20.955 6.233,21.463 6.233,23.71 5.94,24.003 5.153,24.003 D17.2 5.15,25.965 5.05,26.065 R36.1
-SENSE_7_DC: D20.2 R42.1 U13.2 | length 5.5
  Bottom Layer w0.5: D20.2 10.1,25.965 10.2,26.065 R42.1 ; D20.2@10.328,23.762 10.922,23.762 11.443,23.241 11.443,22.772 11.715,22.5 12.62,22.5 12.77,22.35 U13.2
-SENSE_8_DC: D23.2 R48.1 U15.2 | length 10.6
  Top Layer w0.5: U15.2 10.38,22.1 10.38,21.256 10.681,20.955 13.475,20.955 13.983,21.463 13.983,23.71 13.69,24.003 12.903,24.003 D23.2 12.9,25.965 12.8,26.065 R48.1
GND: C1.1 C2.1 C3.1 C4.1 C5.1 C6.1 C7.1 C8.1 J1.15 J1.16 J1.17 J1.18 J1.23 J1.24 J1.41 J1.42 J1.45 J1.46 J1.51 J1.52 U1.3 U3.3 U5.3 U7.3 U9.3 U11.3 U13.3 U15.3 | length 29.6
  Top Layer w0.2: J1.41 7.6,1.6 7.6,2.762 8.514,3.676 9,3.676
  Top Layer w0.5: J1.15 -6.2,3.676 ; J1.17 -2.2,3.676 ; J1.23 0.2,3.676 ; J1.45 9,3.676 ; J1.51 11.4,3.676
  Bottom Layer w0.5: J1.16 -5.8,3.9 ; J1.18 -1.8,3.9 ; J1.24 0.6,3.9 ; J1.42 7.8,3.9 ; J1.46 9.4,3.9 ; J1.52 11.8,3.9
  other v1: -14,5 14,5 -8,8.25 -6,8.25 -4,8.25 -2,8.25 0,8.25 2,8.25 4,8.25 6,8.25 8,8.25 -14,9 14,9 -14,13 -11.5,13 -9,13 -6.25,13 -3.75,13 -1.25,13 1.25,13 3.75,13 6.25,13 9,13 11.5,13 14,13 -14,17 -9,17 -6.25,17 -1.25,17 1.25,17 6.25,17 9,17 14,17
INPUT_1: D3.1 J2.2 U2.4 | length 25.7
  Int2 w0.5: v1(-10.23,37.25) -10.23,42.983 -7.747,45.466 -7.747,51.562 -8.89,52.705 J2.2
  Bottom Layer w0.5: v1(-10.23,37.25) U2.4 -10.033,39.447 -10.033,40.386 -9.847,40.572 D3.1
INPUT_2: D6.1 J2.3 U4.4 | length 28.1
  Top Layer w0.5: D6.1 -13.152,40.584 -13.02,40.452 -13.02,39.5 U4.4 v1(-12.77,37.25)
  Int1 w0.5: v1(-12.77,37.25) -12.77,42.475 -11.43,43.815 -9.271,43.815 -7.747,45.339 -7.747,51.181 -6.35,52.578 J2.3
INPUT_3: D9.1 J2.4 U6.4 | length 24.7
  Int2 w0.5: J2.4 -3.81,44.958 -2.48,43.628 v1(-2.48,37.25)
  Bottom Layer w0.5: v1(-2.48,37.25) U6.4 -2.283,39.447 -2.283,40.386 -2.097,40.572 D9.1
INPUT_4: D12.1 J2.5 U8.4 | length 25.7
  Top Layer w0.5: D12.1 -5.402,40.584 -5.27,40.452 -5.27,39.5 U8.4 v1(-5.02,37.25)
  Int1 w0.5: v1(-5.02,37.25) -5.02,43.494 -1.257,47.257 J2.5@-1.257,56.5
INPUT_5: D15.1 J2.6 U10.4 | length 25.7
  Int2 w0.5: J2.6 1.27,47.371 5.02,43.621 v1(5.02,37.25)
  Bottom Layer w0.5: v1(5.02,37.25) U10.4 5.217,39.447 5.217,40.386 5.403,40.572 D15.1
INPUT_6: D18.1 J2.7 U12.4 | length 24.7
  Top Layer w0.5: D18.1 2.098,40.584 2.23,40.452 2.23,39.5 U12.4 v1(2.48,37.25)
  Int1 w0.5: v1(2.48,37.25) 2.48,43.501 3.81,44.831 J2.7
INPUT_7: D21.1 J2.8 U14.4 | length 28
  Int2 w0.5: J2.8 6.35,46.99 9.525,43.815 11.557,43.815 12.77,42.602 v1(12.77,37.25)
  Bottom Layer w0.5: v1(12.77,37.25) U14.4 12.967,39.447 12.967,40.386 13.153,40.572 D21.1
INPUT_8: D24.1 J2.9 U16.4 | length 25.7
  Top Layer w0.5: D24.1 9.848,40.584 9.98,40.452 9.98,39.5 U16.4 v1(10.23,37.25)
  Int1 w0.5: J2.9 8.89,52.07 7.747,50.927 7.747,45.466 10.23,42.983 v1(10.23,37.25)
NetD1_2: D1.2 R1.1 | length 1.1
  Top Layer w0.3: D1.2 R1.1
NetD4_2: D4.2 R7.1 | length 1.1
  Top Layer w0.3: D4.2 R7.1
NetD7_2: D7.2 R13.1 | length 1.1
  Top Layer w0.3: D7.2 R13.1
NetD10_2: D10.2 R19.1 | length 1.1
  Top Layer w0.3: D10.2 R19.1
NetD13_2: D13.2 R25.1 | length 1.1
  Top Layer w0.3: D13.2 R25.1
NetD16_2: D16.2 R31.1 | length 1.1
  Top Layer w0.3: D16.2 R31.1
NetD19_2: D19.2 R37.1 | length 1.1
  Top Layer w0.3: D19.2 R37.1
NetD22_2: D22.2 R43.1 | length 1.1
  Top Layer w0.3: D22.2 R43.1
NetR3_1: R3.1 R4.2 | length 1.1
  Bottom Layer w0.5: R4.2 R3.1
NetR3_2: R3.2 U2.1 | length 1.8
  Bottom Layer w0.5: R3.2 U2.1
NetR5_1: R5.1 R6.2 | length 1.1
  Bottom Layer w0.5: R6.2 R5.1
NetR5_2: R5.2 U2.2 | length 1.8
  Bottom Layer w0.5: R5.2 U2.2
NetR9_1: R9.1 R10.2 | length 1.1
  Top Layer w0.5: R10.2 R9.1
NetR9_2: R9.2 U4.1 | length 1.8
  Top Layer w0.5: R9.2 U4.1
NetR11_1: R11.1 R12.2 | length 1.1
  Top Layer w0.5: R12.2 R11.1
NetR11_2: R11.2 U4.2 | length 1.8
  Top Layer w0.5: R11.2 U4.2
NetR15_1: R15.1 R16.2 | length 1.1
  Bottom Layer w0.5: R16.2 R15.1
NetR15_2: R15.2 U6.1 | length 1.8
  Bottom Layer w0.5: R15.2 U6.1
NetR17_1: R17.1 R18.2 | length 1.1
  Bottom Layer w0.5: R18.2 R17.1
NetR17_2: R17.2 U6.2 | length 1.8
  Bottom Layer w0.5: R17.2 U6.2
NetR21_1: R21.1 R22.2 | length 1.1
  Top Layer w0.5: R22.2 R21.1
NetR21_2: R21.2 U8.1 | length 1.8
  Top Layer w0.5: R21.2 U8.1
NetR23_1: R23.1 R24.2 | length 1.1
  Top Layer w0.5: R24.2 R23.1
NetR23_2: R23.2 U8.2 | length 1.8
  Top Layer w0.5: R23.2 U8.2
NetR27_1: R27.1 R28.2 | length 1.1
  Bottom Layer w0.5: R28.2 R27.1
NetR27_2: R27.2 U10.1 | length 1.8
  Bottom Layer w0.5: R27.2 U10.1
NetR29_1: R29.1 R30.2 | length 1.1
  Bottom Layer w0.5: R30.2 R29.1
NetR29_2: R29.2 U10.2 | length 1.8
  Bottom Layer w0.5: R29.2 U10.2
NetR33_1: R33.1 R34.2 | length 1.1
  Top Layer w0.5: R34.2 R33.1
NetR33_2: R33.2 U12.1 | length 1.8
  Top Layer w0.5: R33.2 U12.1
NetR35_1: R35.1 R36.2 | length 1.1
  Top Layer w0.5: R36.2 R35.1
NetR35_2: R35.2 U12.2 | length 1.8
  Top Layer w0.5: R35.2 U12.2
NetR39_1: R39.1 R40.2 | length 1.1
  Bottom Layer w0.5: R40.2 R39.1
NetR39_2: R39.2 U14.1 | length 1.8
  Bottom Layer w0.5: R39.2 U14.1
NetR41_1: R41.1 R42.2 | length 1.1
  Bottom Layer w0.5: R42.2 R41.1
NetR41_2: R41.2 U14.2 | length 1.8
  Bottom Layer w0.5: R41.2 U14.2
NetR45_1: R45.1 R46.2 | length 1.1
  Top Layer w0.5: R46.2 R45.1
NetR45_2: R45.2 U16.1 | length 1.8
  Top Layer w0.5: R45.2 U16.1
NetR47_1: R47.1 R48.2 | length 1.1
  Top Layer w0.5: R48.2 R47.1
NetR47_2: R47.2 U16.2 | length 1.8
  Top Layer w0.5: R47.2 U16.2
NOTR: D3.2 D6.2 D9.2 D12.2 D15.2 D18.2 D21.2 D24.2 J2.1 J2.10 U2.3 U4.3 U6.3 U8.3 U10.3 U12.3 U14.3 U16.3 | length 23.9
  Top Layer w0.5: D6.2 -10.23,41.429 U4.3 ; D12.2 -2.48,41.429 U8.3 ; D18.2 5.02,41.429 U12.3 ; D24.2 12.77,41.429 U16.3
  Bottom Layer w0.5: U2.3 -12.77,41.428 D3.2 ; U6.3 -5.02,41.428 D9.2 ; U10.3 2.48,41.428 D15.2 ; U14.3 10.23,41.428 D21.2
S\E\N\S\E\_\1\: C1.2 D1.1 J1.26 R2.1 U1.4 | length 27.7
  Top Layer w0.3: v1(-7,7.5) D1.1
  Int1 w0.3: v1(-12.34,13.7) -12.34,11.197 -10.033,8.89 -7.62,8.89 -7,8.27 v1(-7,7.5) -7,5.984 -5.715,4.699 0.889,4.699 1.4,4.188 v1(1.4,3.25)
  Bottom Layer w0.3: U1.4 -12.522,15.502 -12.522,15.062 -12.416,14.956 -12.416,14.576 C1.2 ; v1(-12.34,13.7) C1.2 ; R2.1 C1.2 ; J1.26 v1(1.4,3.25)
S\E\N\S\E\_\2\: C2.2 D4.1 J1.28 R8.1 U3.4 | length 27.5
  Top Layer w0.3: C2.2 R8.1 ; v1(-10.66,13.7) R8.1 ; U3.4 -10.472,15.508 -10.472,15.055 -10.578,14.949 -10.578,14.582 R8.1 ; v1(-5,7.5) D4.1
  Int1 w0.3: v1(-10.66,13.7) -10.66,11.168 -9.525,10.033 -6.096,10.033 -5,8.937 v1(-5,7.5) -5,6.016 -4.083,5.099 1.055,5.099 1.074,5.08 1.778,5.08 2.2,4.658 v1(2.2,3.25)
  Bottom Layer w0.3: J1.28 v1(2.2,3.25)
S\E\N\S\E\_\3\: C3.2 D7.1 J1.30 R14.1 U5.4 | length 22.8
  Top Layer w0.3: v1(-3,7.5) D7.1
  Int1 w0.3: v1(-4.59,13.7) -4.59,11.194 -3,9.604 v1(-3,7.5) -3,6.086 -2.413,5.499 1.22,5.499 1.239,5.48 2.521,5.48 3,5.001 v1(3,3.25)
  Bottom Layer w0.3: U5.4 -4.772,15.502 -4.772,15.062 -4.666,14.956 -4.666,14.576 C3.2 ; v1(-4.59,13.7) C3.2 ; R14.1 C3.2 ; J1.30 v1(3,3.25)
S\E\N\S\E\_\4\: C4.2 D10.1 J1.32 R20.1 U7.4 | length 21.6
  Top Layer w0.3: C4.2 R20.1 ; v1(-2.91,13.7) R20.1 ; U7.4 -2.722,15.508 -2.722,15.055 -2.828,14.949 -2.828,14.582 R20.1 ; v1(-1,7.5) D10.1
  Int1 w0.3: v1(-2.91,13.7) -2.91,10.911 -1,9.001 v1(-1,7.5) -1,6.461 -0.438,5.899 1.386,5.899 1.405,5.88 3.137,5.88 3.8,5.217 v1(3.8,3.25)
  Bottom Layer w0.3: J1.32 v1(3.8,3.25)
S\E\N\S\E\_\5\: C5.2 D13.1 J1.34 R26.1 U9.4 | length 20.4
  Top Layer w0.3: v1(1,7.5) D13.1
  Int1 w0.3: v1(2.91,13.7) 2.91,10.911 1,9.001 v1(1,7.5) 1.038,7.462 1.038,6.836 1.594,6.28 3.88,6.28 4.6,5.56 v1(4.6,3.25)
  Bottom Layer w0.3: U9.4 2.728,15.502 2.728,15.062 2.834,14.956 2.834,14.576 C5.2 ; v1(2.91,13.7) C5.2 ; R26.1 C5.2 ; J1.34 v1(4.6,3.25)
S\E\N\S\E\_\6\: C6.2 D16.1 J1.36 R32.1 U11.4 | length 19
  Top Layer w0.3: C6.2 R32.1 ; v1(3,7.5) D16.1 ; v1(4.59,13.7) R32.1 ; U11.4 4.778,15.508 4.778,15.055 4.672,14.949 4.672,14.582 R32.1
  Int1 w0.3: v1(4.59,13.7) 4.59,11.321 3,9.731 3,7.033 3.302,6.731 4.318,6.731 5.4,5.649 v1(5.4,3.25)
  Bottom Layer w0.3: J1.36 v1(5.4,3.25)
S\E\N\S\E\_\7\: C7.2 D19.1 J1.38 R38.1 U13.4 | length 21.6
  Top Layer w0.3: v1(5,7.5) D19.1
  Int1 w0.3: v1(6.2,3.25) 6.2,5.865 5,7.065 5,8.937 6.096,10.033 9.525,10.033 10.66,11.168 v1(10.66,13.7)
  Bottom Layer w0.3: J1.38 v1(6.2,3.25) ; U13.4 10.478,15.502 10.478,15.062 10.584,14.956 10.584,14.576 C7.2 ; v1(10.66,13.7) C7.2 ; R38.1 C7.2
S\E\N\S\E\_\8\: C8.2 D22.1 J1.40 R44.1 U15.4 | length 20.4
  Top Layer w0.3: v1(7,7.5) D22.1 ; C8.2 R44.1 ; v1(12.34,13.7) R44.1 ; U15.4 12.528,15.508 12.528,15.055 12.422,14.949 12.422,14.582 R44.1
  Int1 w0.3: v1(7,3.25) v1(7,7.5) 7,8.27 7.62,8.89 10.033,8.89 12.34,11.197 v1(12.34,13.7)
  Bottom Layer w0.3: J1.40 v1(7,3.25)
pads on no net: J1.1 J1.2 J1.3 J1.4 J1.5 J1.6 J1.9 J1.10 J1.11 J1.12 J1.13 J1.14 J1.19 J1.20 J1.21 J1.22 J1.25 J1.27 J1.29 J1.31 J1.33 J1.35 J1.37 J1.39 J1.43 J1.44 J1.47 J1.48 J1.49 J1.50

## Polygon pours and split planes (outlines as drawn)
NOTR on Bottom Layer "Bottom Notr" (solid, pour order 10): -15,40.767 -15,59.25 15,59.25 15,40.767
GND on Bottom Layer "Bottom GND" (solid, pour order 7): -12.85,0 -12.85,2.4 ccw(c-13.65,2.4) -13.65,3.2 -15,3.2 -15,17.474 15,17.474 15,3.2 13.65,3.2 ccw(c13.65,2.4) 12.85,2.4 12.85,0 -3.1,0 -3.1,3.25 ccw(c-3.85,3.25) -4.6,3.25 -4.6,0
GND on Top Layer "Top GND" (solid, pour order 9): -12.85,0 -12.85,2.4 ccw(c-13.65,2.4) -13.65,3.2 -15,3.2 -15,17.474 15,17.474 15,3.2 13.65,3.2 ccw(c13.65,2.4) 12.85,2.4 12.85,0 -3.1,0 -3.1,3.25 ccw(c-3.85,3.25) -4.6,3.25 -4.6,0
NOTR on Top Layer "Bottom Notr" (solid, pour order 11): -15,40.767 -15,59.25 15,59.25 15,40.767
GND on Int1 "Top GND" (solid, pour order 12): -12.85,0 -12.85,2.4 ccw(c-13.65,2.4) -13.65,3.2 -15,3.2 -15,17.474 15,17.474 15,3.2 13.65,3.2 ccw(c13.65,2.4) 12.85,2.4 12.85,0 -3.1,0 -3.1,3.25 ccw(c-3.85,3.25) -4.6,3.25 -4.6,0
GND on Int2 "Top GND" (solid, pour order 13): -12.85,0 -12.85,2.4 ccw(c-13.65,2.4) -13.65,3.2 -15,3.2 -15,17.474 15,17.474 15,3.2 13.65,3.2 ccw(c13.65,2.4) 12.85,2.4 12.85,0 -3.1,0 -3.1,3.25 ccw(c-3.85,3.25) -4.6,3.25 -4.6,0

## Silkscreen, mask and mechanical layers (free items; w line width, h text height)
Top Overlay:
  lines w0.2: -14.4,4.663 14.3,4.663 ; -14.5,51.5 -14.5,58.5 14.5,58.5 14.5,51.5 -14.5,51.5
  text "N" at -12.43,52.5 h1.5
  text "1" at -9.89,52.5 h1.5
  text "2" at -7.35,52.5 h1.5
  text "3" at -4.81,52.5 h1.5
  text "4" at -2.27,52.5 h1.5
  text "5" at 0.27,52.5 h1.5
  text "6" at 2.81,52.5 h1.5
  text "7" at 5.35,52.5 h1.5
  text "8" at 7.89,52.5 h1.5
  text "N" at 10.43,52.5 h1.5
  text "'.Product_ID_''.Revision_'" at -9.037,45.55 h3
  text "1" at -7.5,6 h0.8
  text "2" at -5.5,6 h0.8
  text "3" at -3.5,6 h0.8
  text "4" at -1.5,6 h0.8
  text "5" at 0.5,6 h0.8
  text "6" at 2.5,6 h0.8
  text "7" at 4.5,6 h0.8
  text "8" at 6.5,6 h0.8
Bottom Overlay:
  lines w0.2: -14.4,4.663 14.3,4.663 ; -14.5,51.5 -14.5,58.5 14.5,58.5 14.5,51.5 -14.5,51.5
  text "N" at -10.43,52.5 h1.5
  text "1" at -7.89,52.5 h1.5
  text "2" at -5.35,52.5 h1.5
  text "3" at -2.81,52.5 h1.5
  text "4" at -0.27,52.5 h1.5
  text "5" at 2.27,52.5 h1.5
  text "6" at 4.81,52.5 h1.5
  text "7" at 7.35,52.5 h1.5
  text "8" at 9.89,52.5 h1.5
  text "N" at 12.43,52.5 h1.5
  text "'.Product_ID_''.Revision_'" at 8.963,45.55 h3
  text "DANGER HIGH VOLTAGE" at 13.963,5.155 h2
Top Solder:
  rectangle: -15,0 15,2.7
Bottom Solder:
  rectangle: -15,0 15,2.7
Board Shape:
  lines w0.1: -15,3.2 -15,59.25 15,59.25 15,3.2 13.65,3.2 ccw(c13.65,2.4) 12.85,2.4 12.85,0 -3.1,0 -3.1,3.25 ccw(c-3.85,3.25) -4.6,3.25 -4.6,0 -12.85,0 -12.85,2.4 ccw(c-13.65,2.4) -13.65,3.2 -15,3.2 ; -8,13.25 ccw(c-7.5,13.25) -7,13.25 -7,43.25 ccw(c-7.5,43.25) -8,43.25 -8,13.25 ; -0.5,13.123 ccw(c0,13.123) 0.5,13.123 0.5,43.123 ccw(c0,43.123) -0.5,43.123 -0.5,13.123 ; 7,13.245 ccw(c7.5,13.245) 8,13.245 8,43.245 ccw(c7.5,43.245) 7,43.245 7,13.245

## Text inside footprints (layer, text, board x,y; h text height)
J1: Top Overlay "51" at 11.652,2.806 h0.8 r90; Top Overlay "17" at -1.943,2.78 h0.8 r90; Top Overlay "15" at -5.884,2.779 h0.8 r90; Top Overlay "1" at -11.543,2.715 h0.8 r90